# Altium PCB MainBoardCurrent.PcbDoc (part 2 of 2)
Units mil, origin at the board's own origin, x right, y up, seen from the top; angles counter-clockwise.
Board outline 3540 x 3540 mil, 4 copper layers (Top Copper, GND, PWR, Bottom Copper), stack 61.811 mil thick; 59 components, 71 nets, 545 pads, 135 vias.
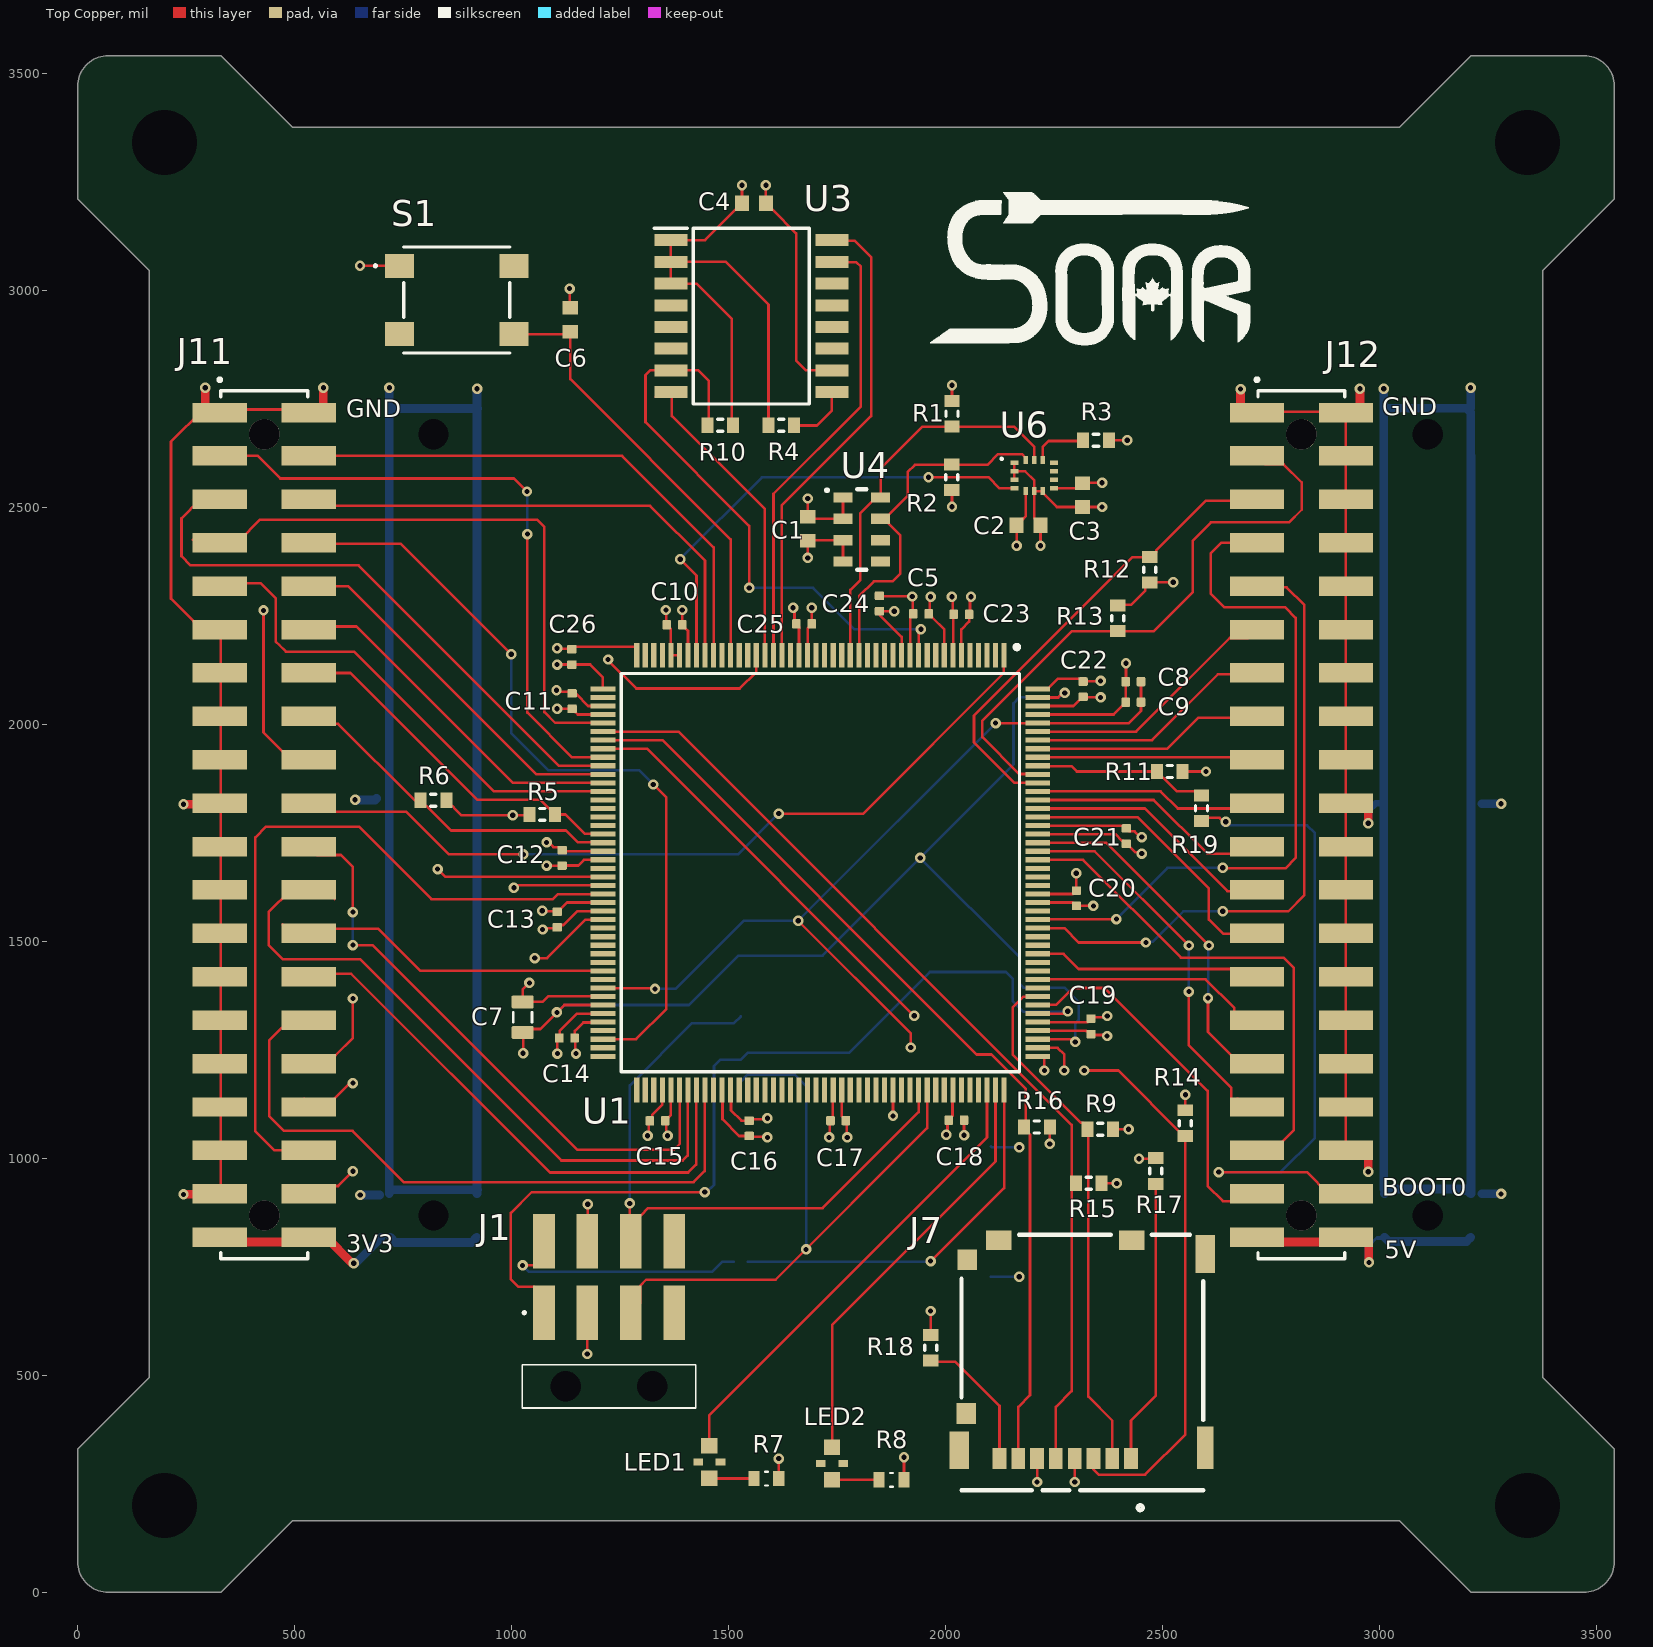
[diagram p0: Top Copper view]

## Silkscreen, mask and mechanical layers (free items; w line width, h text height)
Top Overlay:
  drawing of 5 lines, arcs and shapes, not listed
  text "GND" at 3006,2712 h40
  text "GND" at 619,2707 h40
  text "BOOT0" at 3005,914 h40
  text "3V3" at 619,783 h40
  text "5V" at 3011,770 h40
Bottom Overlay:
  text "GND" at 651.84,2698.39 h40
  text "GND" at 2941,2698 h40
  text "3V3" at 653,800 h40
  text "5V" at 2943,797 h40
Board Outline:
  the board outline again, w4